# Altium PCB PCB2.PcbDoc
Units mil, origin at the board's own origin, x right, y up, seen from the top; angles counter-clockwise.
Board outline 2365 x 1390 mil, 2 copper layers (Top Layer, Bottom Layer); 16 components, 9 nets, 50 pads, 2 vias.
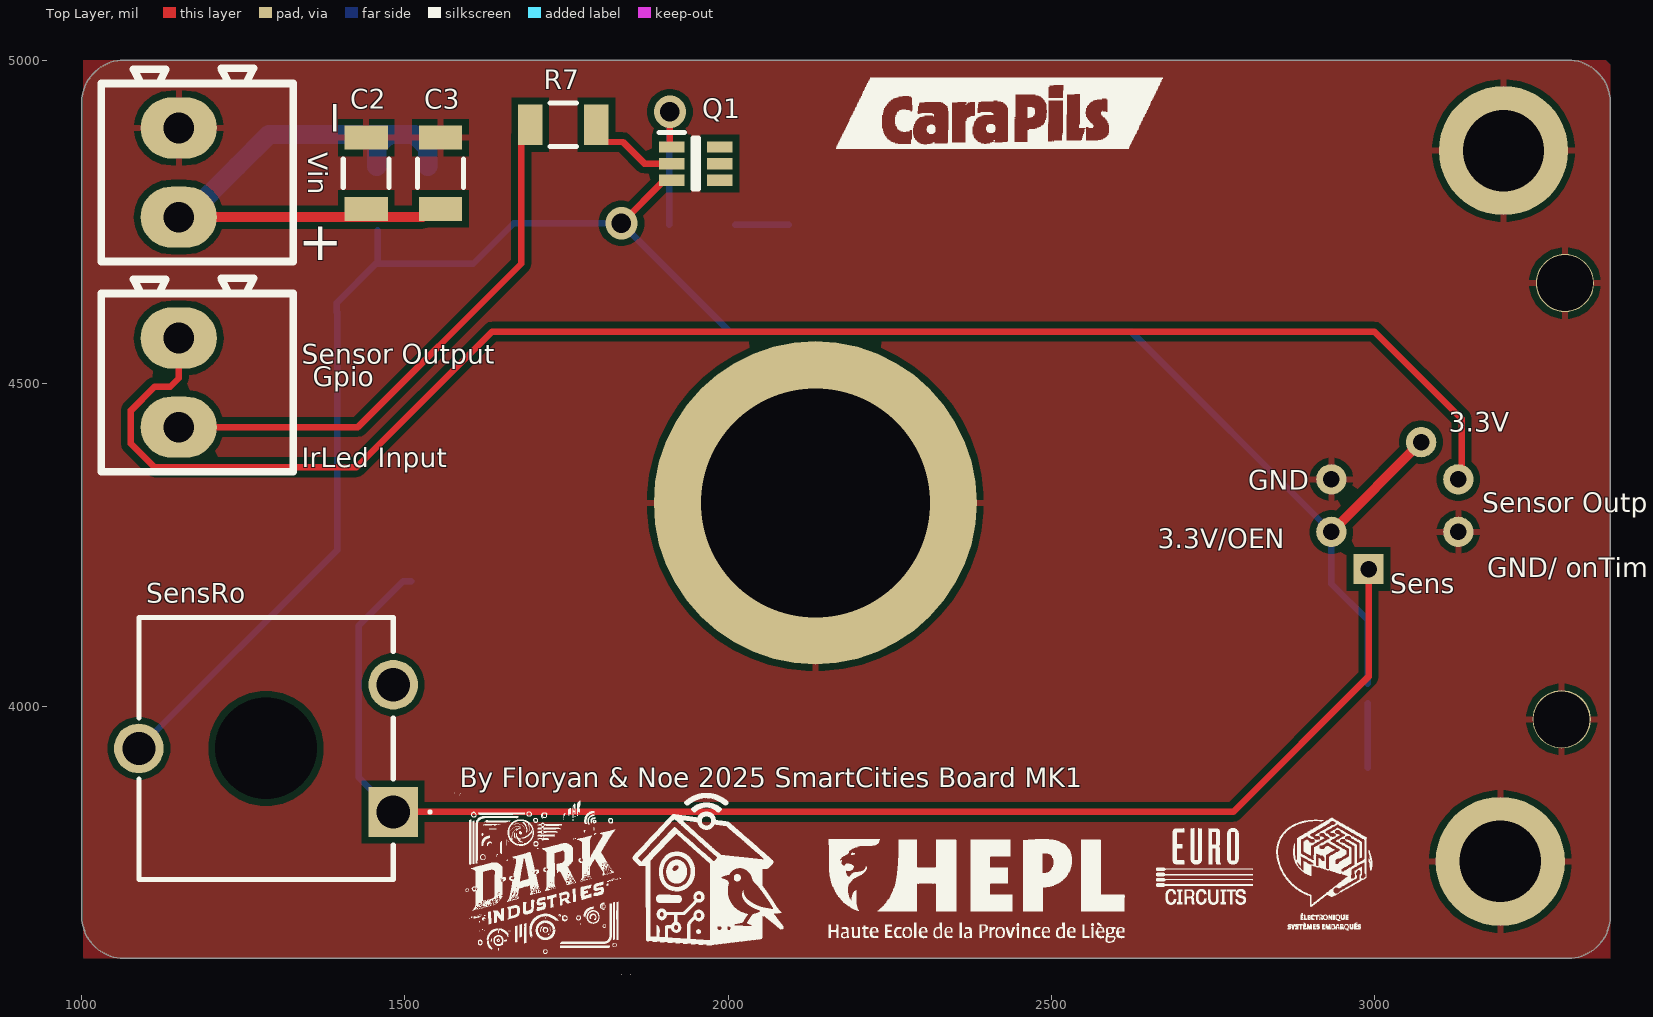
[diagram p0: Top Layer view]
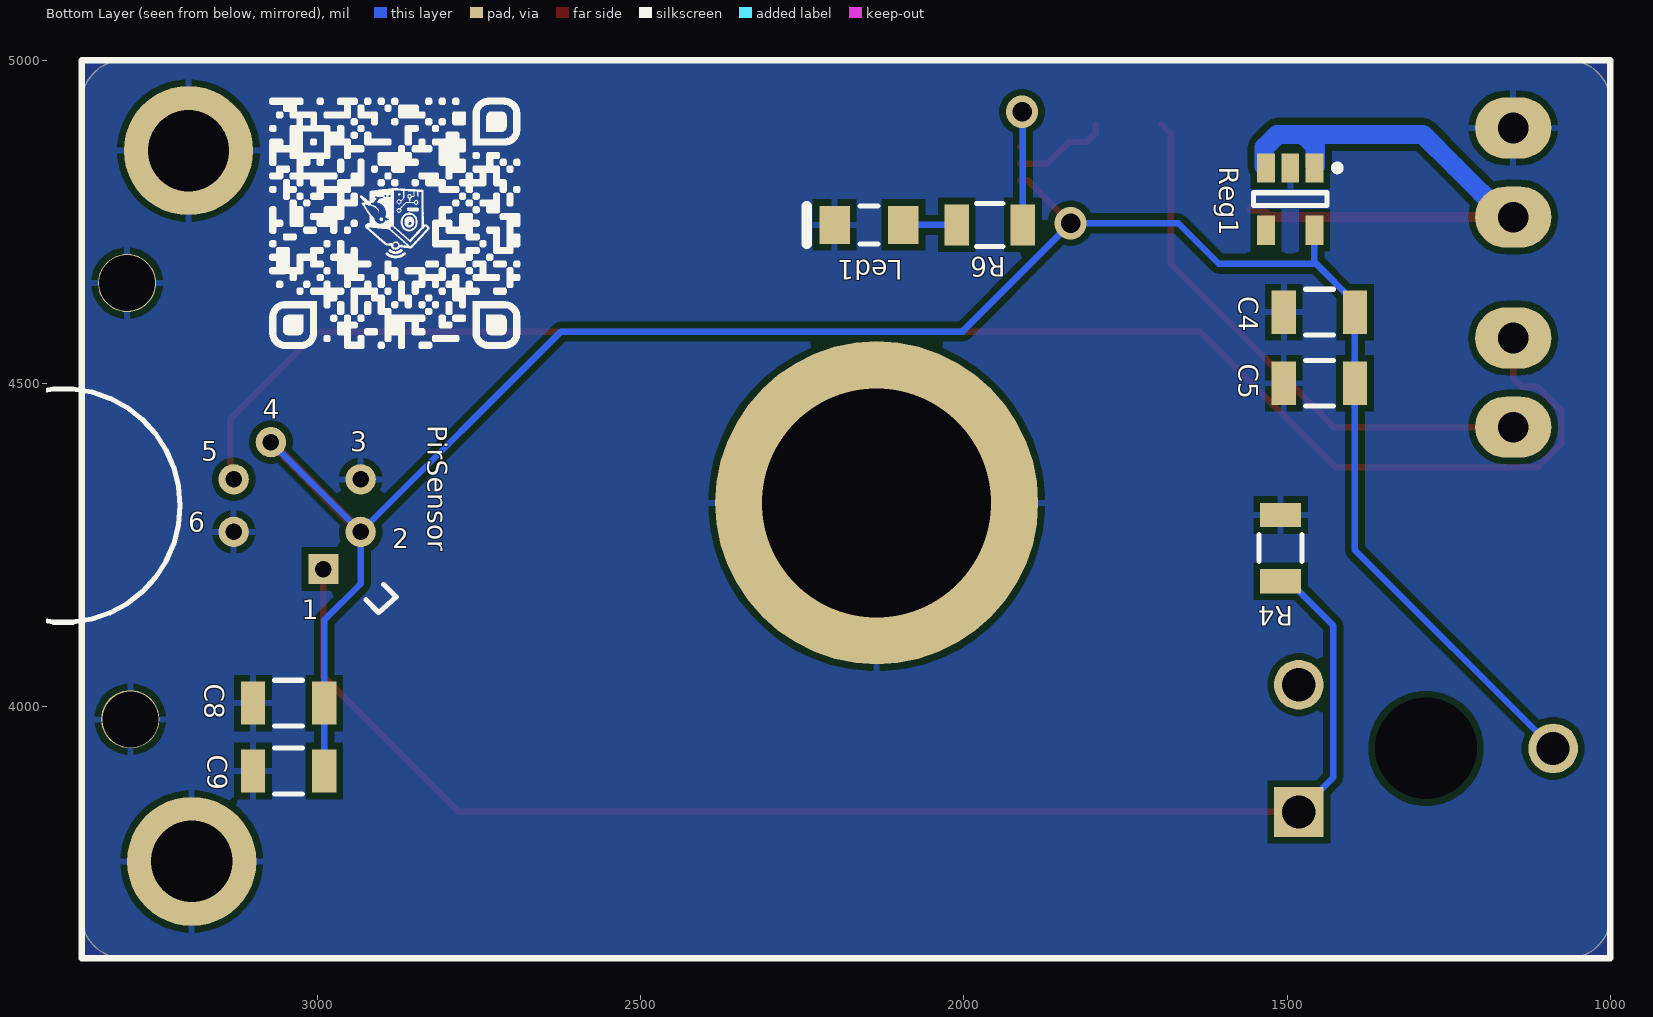
[diagram p1: Bottom Layer view, seen from below]
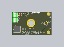
[diagram p2: 3D render of the assembled board from above, using the file's embedded part models]
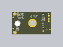
[diagram p3: 3D render of the assembled board from below, using the file's embedded part models]

## Layer stack, top to bottom
Top Solder: solder mask 0.4, Solder Resist, Dk 3.5
Top Layer: signal copper 1.4
Dielectric 1: dielectric 12.6, FR-4, Dk 4.8
Bottom Layer: signal copper 1.4
Bottom Solder: solder mask 0.4, Solder Resist, Dk 3.5

## Board outline
1065,3610 cw(c1065,3675) 1000,3675 1000,3674.89 1000,4935 cw(c1065,4935) 1065,5000 3300,5000 cw(c3300,4935) 3365,4935 3365,4935.11 3365,3675 cw(c3300,3675) 3300,3610 3300.11,3610

## Design rules (kind name [scope] priority, off if disabled: settings)
Clearance [All] p1: gap=10 ignorepadtopadclearanceinfootprint=FALSE
PolygonConnect [All] p1: connectstyle=Relief reliefconductorwidth=10 reliefentries=4 polygonreliefangle="90 Angle" airgapwidth=10
RoutingVias [All] p1: holewidth=28 width=50 viastyle="Through Hole" minholewidth=28 minwidth=50 maxholewidth=28 maxwidth=50
SolderMaskExpansion [All] p1: expansion=4 istentingtop=FALSE
SupplyNets "Schematic Supply Nets_2" [InNet('Vin')] p1: voltage=0.000
SupplyNets "Schematic Supply Nets_1" [InNet('GND')] p2: voltage=0.000
SupplyNets "Schematic Supply Nets" [InNet('+3')] p3: voltage=0.000
Width alim [InNetClass('Alim')] p1: maxlimit=30 minlimit=10 preferedwidth=30 minimp=50.000000 maximp=50.000000 favimp=50.000000
Width all [InNetClass('All')] p2: maxlimit=10 minlimit=10 preferedwidth=10
30 further rules are at their usual default settings.

## Components (designator, comment, footprint, x,y, rotation, side; value= is the part's Value field where it differs from the comment)
C2 "1uF" FP-C1206C-EH-MFG 1440,4825 r90 top
C3 "4.7uF" FP-C1206C-EH-MFG 1555,4825 r90 top
C4 "1uF" FP-C1206C-EH-MFG 1449.88,4610 r0 bottom
C5 "4.7uF" FP-C1206C-EH-MFG 1450,4500 r0 bottom
C8 "C1206C107M9PACTU" FP-C1206C-EH-MFG 3045,4005 r0 bottom
C9 "C1206C107M9PACTU" FP-C1206C-EH-MFG 3045,3900 r0 bottom
Gpio "" TS-75x70 1150,4501.1 r90 top
Led1 "SML-LX1206YC-TR" LUMX-SML-LX1206YC-TR_V 2146.85,4745 r0 bottom
PirSensor "5578" 5578 2991.1,4212.48 r180 bottom
Q1 "BSS138PS,115" SOT65P210X110-6N 1950,4840 r0 top
R4 "CRGP1206F10K" FP-CRGP1206-IPC_C 1510,4245 r270 bottom value=10KΩ
R6 "CRGP1206F10K" FP-CRGP1206-IPC_C 1960,4745 r180 bottom value=10KΩ
R7 "CRGP1206F10K" FP-CRGP1206-IPC_C 1745,4900 r180 top value=10KΩ
Reg1 "ADP150AUJZ-3.3-R7" ADI-UJ-5_M 1495,4785 r270 bottom
SensRo "PTN10-E20HB20" PTN10E20HB20 1481.85,3836.57 r90 top
Vin "" TS-75x70 1150,4826.1 r90 top

## Footprints (in the part's own frame and the unit in brackets; to place one, negate y for a bottom-side part, rotate by r counter-clockwise, add the part's x,y. Pads: shape width x height; smd on the part's side, far side on the other; paste and mask are expansions set on the pad)
5578 [mm]
  rect 1.192x1.192 hole 0.65: 1(0,0)
  round 1.192 hole 0.65: 2(1.461,1.461) 3(1.461,3.527) 4(-2.066,4.988) 5(-3.528,3.527) 6(-3.528,1.461)
  silkscreen extent -14.83,-2.09 2.87,7.08, body extent -5.88,-2.64 3.22,6.46, height 5.19
ADI-UJ-5_M [mm] "SOT23, 5-Leads, Body 2.9x1.6mm, Pitch 0.95mm, IPC Low Density"
  rect 1.15x0.7 smd: 1(-1.225,0.95) 2(-1.225,0) 3(-1.225,-0.95) 4(1.225,-0.95) 5(1.225,0.95)
  silkscreen extent -1.35,-1.45 0.25,1.97, body extent -0.8,-1.45 0.8,1.45, height 1
FP-C1206C-EH-MFG [mm]
  rect 0.95x1.7 smd paste+0 mask+0: 1(-1.4,0) 2(1.4,0)
  silkscreen extent -0.55,-0.9 0.55,0.9, body extent -1.6,-0.8 1.6,0.8, height 1.8
FP-CRGP1206-IPC_C [mil]
  rect 37.64x63.38 smd paste+0 mask+0: 1(-51.22,0) 2(51.22,0)
  silkscreen extent -21,-33 21,33, body extent -61,-31 61,31, height 26
LUMX-SML-LX1206YC-TR_V [mm] "SMD, 2-Leads, Body 3.2x1.5mm"
  rect 1.2x1.5 smd: 1(-1.35,0) 2(1.35,0)
  silkscreen extent -0.35,-0.75 2.45,0.75, body extent -1.6,-0.75 1.6,0.75, height 1.25
PTN10E20HB20 [mm]
  rect 1.95x1.95 hole 1.3: A1(0,0)
  round 1.95 hole 1.3: E1(5,0) S1(2.5,10)
  round 2 hole 4 unplated: MH1(2.5,5)
  silkscreen extent -2.65,-1.5 7.65,10, body extent -2.65,-0.55 7.65,10.55, height 6.3
SOT65P210X110-6N [mm]
  rect 1x0.45 smd: 1(-0.95,0.65) 2(-0.95,0) 3(-0.95,-0.65) 4(0.95,-0.65) 5(0.95,0) 6(0.95,0.65)
  silkscreen extent -1.45,-1 0.1,1.22, body extent -1.05,-1.06 1.05,1.09, height 0.95
TS-75x70 [mm] "pitch 3.5mm"
  oval 2.4x3 hole 1.2: 1(-1.75,0) 2(1.75,0)
  silkscreen extent -3.5,-4.5 4.09,3.05, body extent -3.58,-4.5 4.12,3.05, height 9.15

## Part data
C2 C3 C4 C5 C8 C9: library part CMP-1037-05005-3, "CAP CER 100UF 6.3V X5R 1206", Capacitance=100uF, Case Code (Imperial)=1206, Case Code (Metric)=3216, Dielectric=X5R, Dielectric Material=Ceramic, Max Operating Temperature=85°C, Min Operating Temperature=-55°C, Package Quantity=1, Tolerance=2%, Voltage=6.3V, Case/Package=1206, Construction=Flat, Depth=1.6mm, Dissipation Factor=5%, Height=1.6mm, Lead Free="Lead Free", Length=3.2mm, Mount="Surface Mount", Number of Pins=2, Packaging="Tape and Reel", Radiation Hardening=No, REACH SVHC="No SVHC", RoHS Compliant=Yes, Series=C, Termination=SMD/SMT, Thickness=0.071inch, Voltage Rating=6.3V, Voltage Rating (DC)=6.3V, Width=0.063inch
Gpio Vin: library part Connector-2, "Fixed Terminal Blocks PT 1.5/2-3.5H 2POS HRZ 3.5mm SCREW", Manufacturer="Phoenix Contact", Manufacturer Part Number=1984617, Supplier Part Number=651-1984617, MOQ=1, Supplier=Mouser, Supplier Unit Price=0.55
Led1: library part CMP-2000-07124-1, "Yellow LED, Water Clear Len, 585 nm, 2.1 V, -40 to 85 degC, 2-Pin SMD, RoHS, Tape and Reel", Color=Yellow, Current - Test=20mA, Lens Color=Colorless, Manufacturer=Lumex, Millicandela Rating=6mcd, Package / Case=1206(3216Metric), Package Description="2-Pin Surface Mount Device, Body 3.2 x 1.5 mm", Standard Package=3,000, Supplier Device Package=1206, Voltage - Forward (Vf) (Typ)=2.1V, Catalog Drawings=SML-LX1206SeriesTopSML-LX1206SeriesSideSML-LX1206SeriesBottomSML-LX1206SeriesFootprint, Category=Optoelectronics, Datasheet URL=http://www.lumex.com/content/files/ProductAttachment/SML-LX1206YC-TR.pdf, Datasheet Version="Rev. K, 08/2012", Family=LEDIndication-Discrete, Features=-, Height (Max)=1.10mm, Lens Style/Size=RectanglewithFlatTop, Lens Transparency=Clear, Manufacturer URL=http://www.lumexinstruments.com/, Mounting Technology=SurfaceMount, Mounting Type=SurfaceMount, Online Catalog=SML-LX1206RectanglewithFlatTop1206PackageLEDs, Other Names=67-1358-2LU60357TRSMLLX1206YCTR, Package Reference=SML-LX1206YC-TR, Packaging=Tape&Reel(TR), Product Training Modules=LEDsBenefitsofCustomLEDandLCDTechnology, RoHS Information=RoHSCertofCompliance, Series=-, Size / Dimension=3.20mmLx1.60mmW, Viewing Angle=160°, Wavelength - Dominant=-, Wavelength - Peak=585nm
PirSensor: "Integrated Circuit", Manufacturer_Name=Adafruit, Mouser Part Number=485-5578, Datasheet Link=https://cdn-shop.adafruit.com/product-files/5578/C17724.pdf, Height=4.4mm, Manufacturer_Part_Number=5578, Mouser Price/Stock=https://www.mouser.co.uk/ProductDetail/Adafruit/5578?qs=T%252BzbugeAwji3%252BSdFXYinnQ%3D%3D
Q1: "MOSFET (N-Channel)", Manufacturer_Name=Nexperia, Mouser Part Number=771-BSS138PS115, Arrow Part Number=BSS138PS,115, Arrow Price/Stock=https://www.arrow.com/en/products/bss138ps115/nexperia?utm_currency=USD&region=nac, Datasheet Link=https://assets.nexperia.com/documents/data-sheet/BSS138PS.pdf, Height=1.1mm, Manufacturer_Part_Number=BSS138PS,115, Mouser Price/Stock=https://www.mouser.co.uk/ProductDetail/Nexperia/BSS138PS115?qs=A1cBxND5mHLezFUI6z0jIg%3D%3D
R4 R6 R7: library part CMP-03211-004788-1, "CRGP 1206 10K 1%", Ambient Temperature Range High=+70°C, Manufacturer=TE, Package=CRGP1206, Power Rating=0.5W, Resistance=10KΩ, Temperature="-55°C to +155°C", Temperature Coefficient=±100ppm/°C, Temperature Range High=+155°C, Temperature Range Low=-55°C, Tolerance=0.01, Voltage Rating=200V, Automotive=No, Category=Res, ComponentLink2Description=Datasheet, ComponentLink2URL=https://www.mouser.com/datasheet/2/418/NG_DS_9-1773463-9_A-1358566.pdf, Composition="Thick Film", Device Class L1="Passive Components", Device Class L2=Resistors, Device Class L3="Chip SMD Resistors", Digikey Description="CRGP 1206 10K 1%", Height=0.65mm, Ipc Land Pattern Name=RESC310155X55, Lead Free=Yes, Manufacturer Part Number=CRGP1206F10K, Octopart=https://octopart.com/crgp1206f10k-te+connectivity-91018843, RoHS=TRUE, Series=CRGP
Reg1: library part CMP-0786-00394-1, "Ultralow Noise, 150 mA CMOS Linear Regulator, 2.2 to 5.5 V Vin, 3.3 V Vout, Industrial, 5-pin SOT23 (UJ-5), Reel", Manufacturer="Analog Devices", Preset Vout Values (V)=3.3, Supply Current IGND @ Small Load=10uA, Code_JEDEC=MO-193-AB, ComponentLink1Description="Manufacturer URL", ComponentLink1URL=http://www.analog.com/en/index.html, ComponentLink2Description=Datasheet, ComponentLink2URL=http://www.analog.com/static/imported-files/data_sheets/ADP150.pdf, ComponentLink3Description="Package Specification", ComponentLink3URL=http:/www.analog.com/static/imported-files/packages/PKG_PDF/TSOT(UJ)/UJ_5.pdf, ComponentLink4Description="URL Link1", ComponentLink4URL="Product URL:http://www.analog.com/en/ADP150/productSearch.html", DatasheetVersion="Rev. A", Iout max=150mA, Mounting Technology="Surface Mount", PackageDescription="5-Pin Thin Small Outline Transistor Package, Body 2.9 x 1.6 mm, Pitch 0.95 mm", PackageReference=UJ-5, PackageVersion="100708-A, 10/2008", Packing=Reel, PartNumber=ADP150AUJZ-3.3-R7, Vin (max) (V)=5.5, Vin (min) (V)=2.2
SensRo: "Variable Resistor", Manufacturer_Name="Same Sky", Mouser Part Number=179-PTN10-E20HB20, Datasheet Link=https://www.sameskydevices.com/product/resource/supplyframepdf/ptn10.pdf, Height=6.2mm, Manufacturer_Part_Number=PTN10-E20HB20, Mouser Price/Stock=https://www.mouser.co.uk/ProductDetail/CUI-Devices/PTN10-E20HB20?qs=vvQtp7zwQdNJZy18bg52oA%3D%3D

## Free pads (board coordinates)
  round 500 hole 354.33: 19(2135,4315)
  round 200 hole 125.98: 19(3195,3760) 19(3200,4860)
  round 90 hole 86.61: 21(3290,3980) 21(3295,4655)

## Via types
v1: diameter 50, hole 30, Top Layer to Bottom Layer, 2 vias

## Nets (pads, with @x,y where several pads share a name; then routed paths per layer and width w, separated by ;. In a path a pad name is that pad's centre, name@x,y a point inside that pad or via, vN(x,y) a via of type N, cw(c..) or ccw(c..) an arc to the next point about the centre after c; other vN are vias at no path point)
+3: C4.1 C5.1 C8.1 C9.1 PirSensor.2 PirSensor.4 Q1.3 Reg1.5 SensRo.S1 | length 3513.1
  Top Layer w10: v1(1835,4747.64) 1901.77,4814.41 Q1.3
  Top Layer w15: PirSensor.2 PirSensor.4
  Bottom Layer w10: SensRo.S1 1394.88,4241.73 C5.1 1394.88,4609.88 C4.1 1394.76,4624.76 1457.6,4687.6 Reg1.5 ; 1455.86,4685 1605.77,4685 1668.41,4747.64 v1(1835,4747.64) 1835,4747.05 2002.05,4580 2623.58,4580 PirSensor.2 ; C9.1@2989.88,3905 C8.1 ; C8.1@2989.88,4035 2989.88,4133.59 2933.58,4189.89 PirSensor.2 ; PirSensor.4 PirSensor.2
GND: C2.2 C3.2 C4.2 C5.2 C8.2 C9.2 Led1.2 pad.19 pad.21 PirSensor.3 PirSensor.6 R4.1 Reg1.2 Vin.2
NetLed: Gpio.1 R7.2 | length 855.4
  Top Layer w10: Gpio.1 1427.2,4432.2 1679.96,4684.96 1679.96,4886.18 R7.2
NetLed1_1: Led1.1 R6.1 | length 82.5
  Bottom Layer w10: R6.1 Led1.1
NetOutCap: Gpio.2 PirSensor.5 | length 2521.3
  Top Layer w10: Gpio.2 1150,4507.76 1136.69,4494.45 1112.41,4494.45 1075.94,4457.99 1075.94,4406.42 1112.41,4369.96 1424.96,4369.96 1635,4580 3000,4580 3135,4445 3135,4356.34 PirSensor.5
NetPirSensor_1: PirSensor.1 R4.2 SensRo.A1 | length 2183
  Top Layer w10: SensRo.A1 2781.57,3836.57 2991.1,4046.1 PirSensor.1
  Bottom Layer w10: SensRo.A1 1428.46,3889.96 1428.46,4125.11 1497.13,4193.78 R4.2
NetQ1_1: Q1.1 R6.2 | length 216
  Top Layer w10: v1(1910,4920) 1910,4868.19 Q1.1
  Bottom Layer w10: R6.2 1908.78,4903.78 v1@1910,4905
NetQ1_2: Q1.2 R7.1 | length 148.8
  Top Layer w10: R7.1 1796.22,4887.13 1810.04,4873.31 1837.32,4873.31 1870.63,4840 Q1.2
Vin: C2.1 C3.1 Reg1.1 Reg1.3 Vin.1 | length 954.6
  Top Layer w15: Vin.1 1527.56,4757.2 1540.24,4769.88 C3.1
  Bottom Layer w10: 1457.6,4879.14 1463.46,4885 ; Reg1.3 Reg1.3@1535,4835.83
  Bottom Layer w15: Vin.1 Vin.1@1161.81,4757.2 ; 1457.6,4885 1463.46,4885
  Bottom Layer w30: Vin.1@1161.81,4757.2 1240.43,4835.83 1289.61,4885 1457.6,4885 1515,4885 1535,4865 Reg1.3@1535,4835.83 ; Reg1.1@1456.22,4835.83 1456.22,4866.22 1470.87,4880.87
pads on no net: Q1.4 Q1.5 Q1.6 Reg1.4 SensRo.E1 SensRo.MH1

## Polygon pours and split planes (outlines as drawn)
GND on Top Layer "NONET_L-01_P-001" (solid, pour order 1): 1002.04,4999.52 1002.04,3612.04 1000,3610 3365,3610 3365,5000
GND on Bottom Layer "NONET_L-01_P-001" (solid, pour order 0): 1000.59,5000.45 1000,4999.86 1000,3610 3365,3610 3365,5000

## Silkscreen, mask and mechanical layers (free items; w line width, h text height)
Top Overlay:
  drawing of 501 lines, arcs and shapes, not listed
  text "_" at 1375,4890 h60 r90
  text "+" at 1335,4690 h60
  text "Sensor Output" at 1340,4530 h30
  text "3.3V" at 3115,4425 h30
  text "IrLed Input" at 1340,4370 h30
  text "GND" at 2805,4335 h30
  text "Sensor Output" at 3167.38,4300 h30
  text "3.3V/OEN" at 2665,4245 h30
  text "GND/ onTime" at 3175,4200 h30
  text "Sens" at 3025,4175 h30
  text "By Floryan & Noe 2025 SmartCities Board MK1" at 1585,3875 h30
Bottom Overlay:
  drawing of 124 lines, arcs and shapes, not listed
  text "4" at 3085,4445 h30
  text "3" at 2950,4395 h30
  text "5" at 3180,4380 h30
  text "6" at 3200,4270 h30
  text "2" at 2885,4245 h30
  text "1" at 3025,4135 h30
Mechanical 1:
  lines w10: 1000,3674.89 1000,4935 cw(c1065,4935) 1065,5000 3300,5000 cw(c3300,4935) 3365,4935 ; 1000,3675 ccw(c1065,3675) 1065,3610 3300.11,3610 ; 1640,4316.3 3352.6,4316.3 ; 3300,3610 ccw(c3300,3675) 3365,3675 3365,4935.11 ; 1640,3922.6 1640,4710 3352.6,4710 3352.6,3922.6 1640,3922.6

## Dimensions
2150,4315 to 3352.6,4316.3 on Mechanical 1
1640,4710 to 1640,3922.6 on Mechanical 1